# Altium PCB KORICHE_N2.PCBDOC
Units mm, origin at the board's own origin, x right, y up, seen from the top; angles counter-clockwise.
Board outline 62.36 x 50.17 mm, 2 copper layers (TopLayer, BottomLayer); 26 components, 22 nets, 109 pads, 13 vias.
Unrouted connection lines stored in the file: 2.
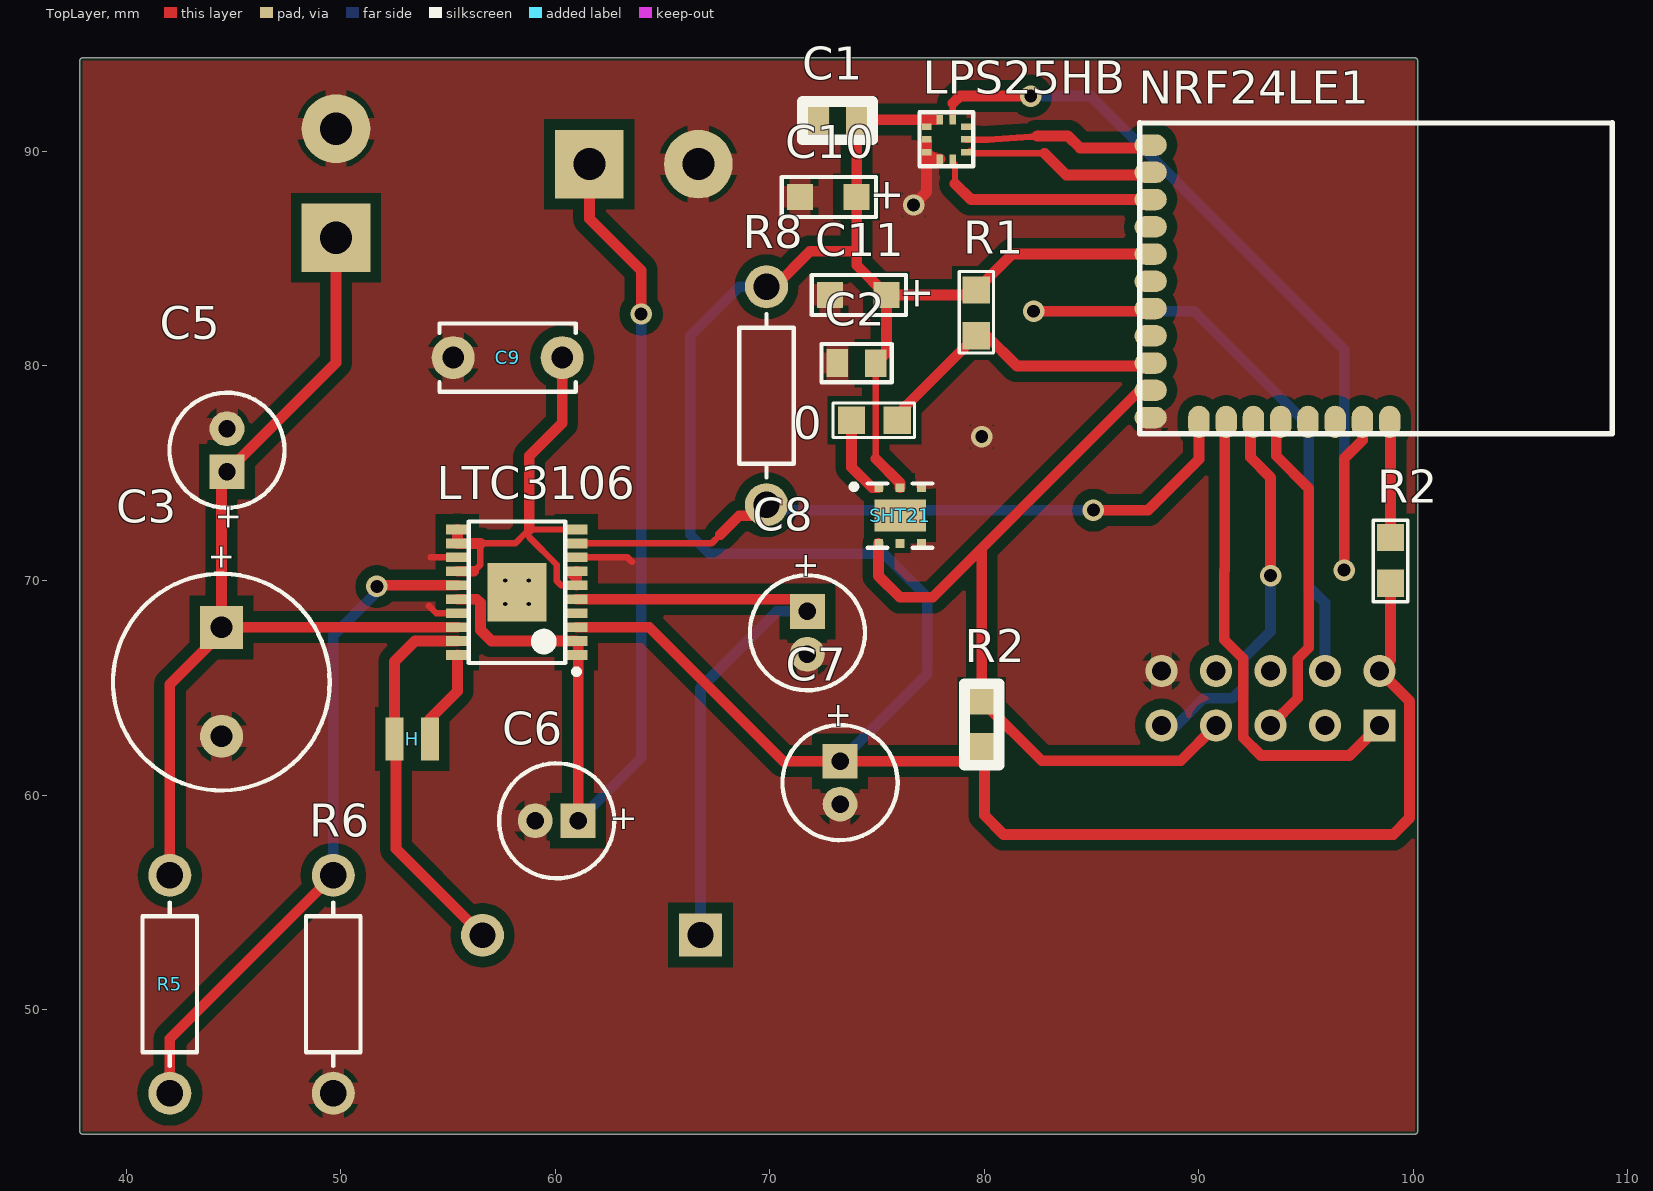
[diagram p0: TopLayer view]
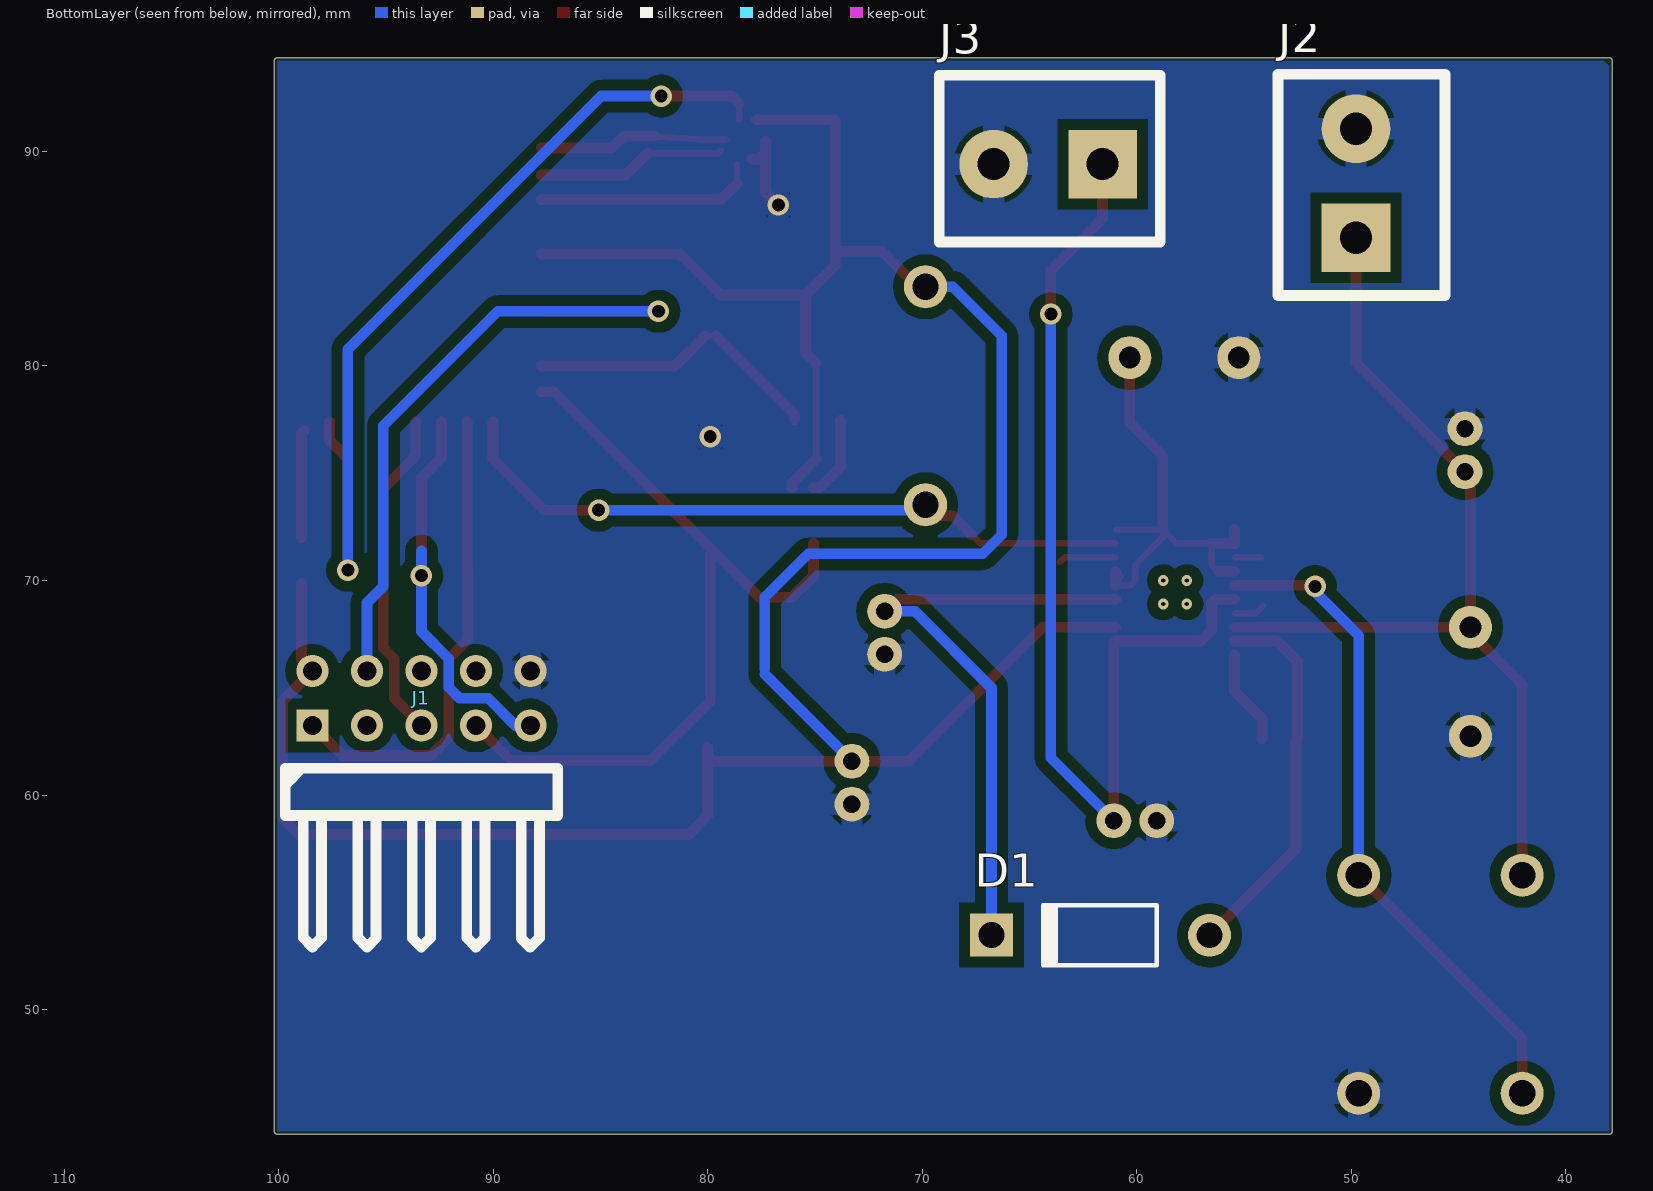
[diagram p1: BottomLayer view, seen from below]
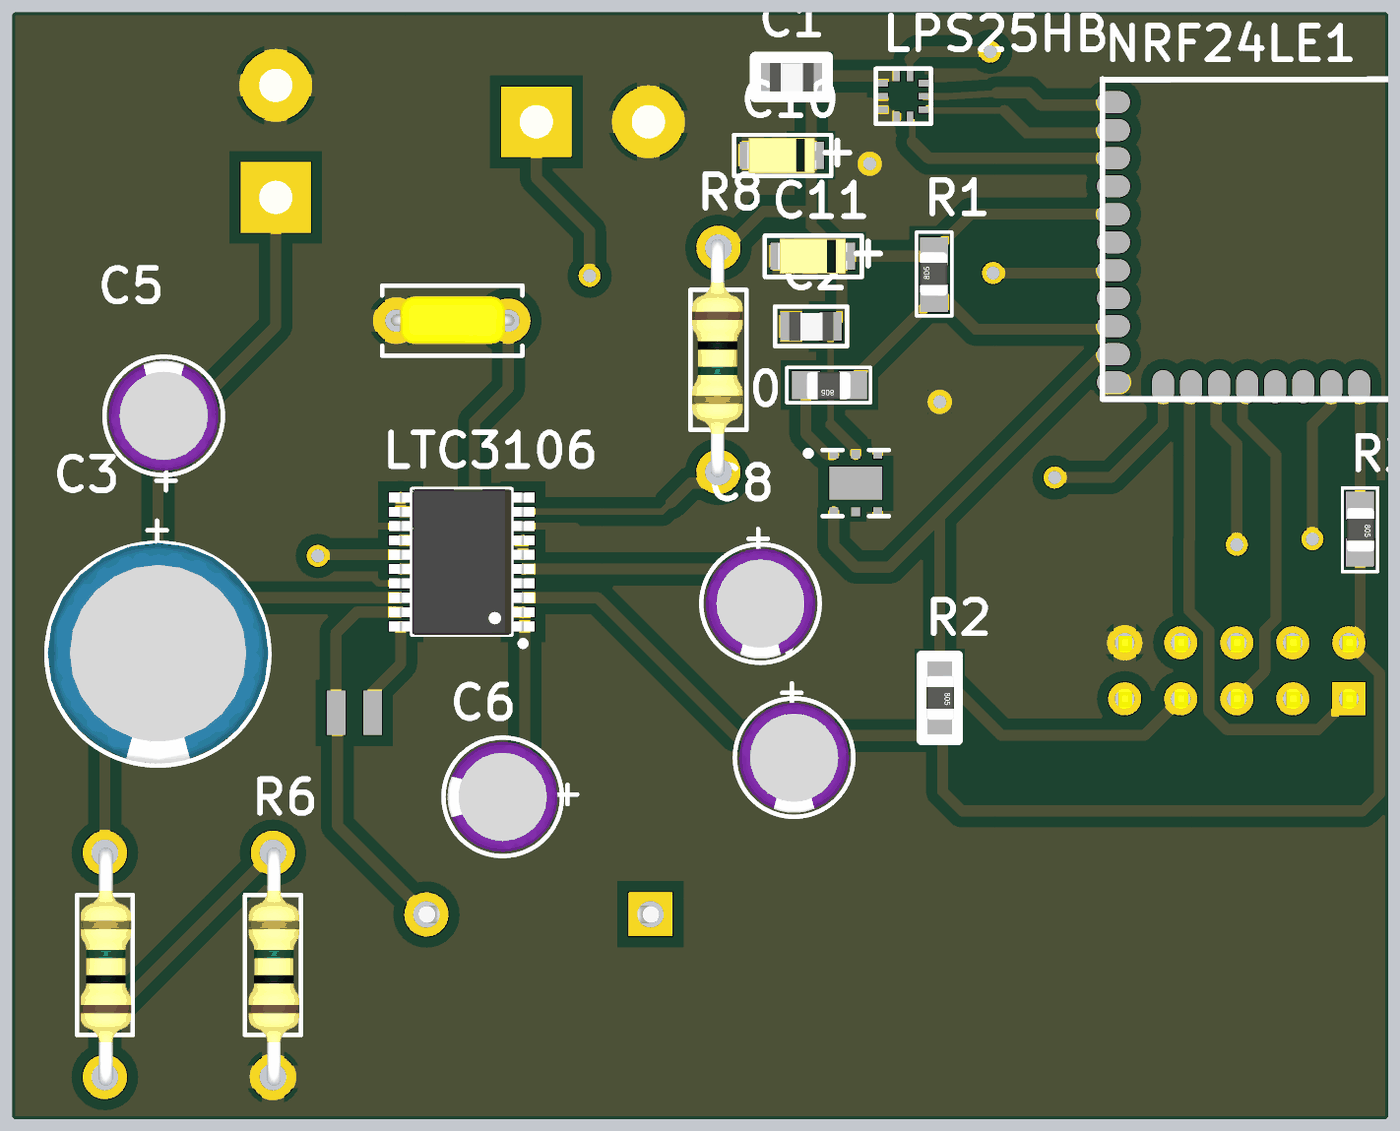
[diagram p2: 3D render of the assembled board from above, using the file's embedded part models]
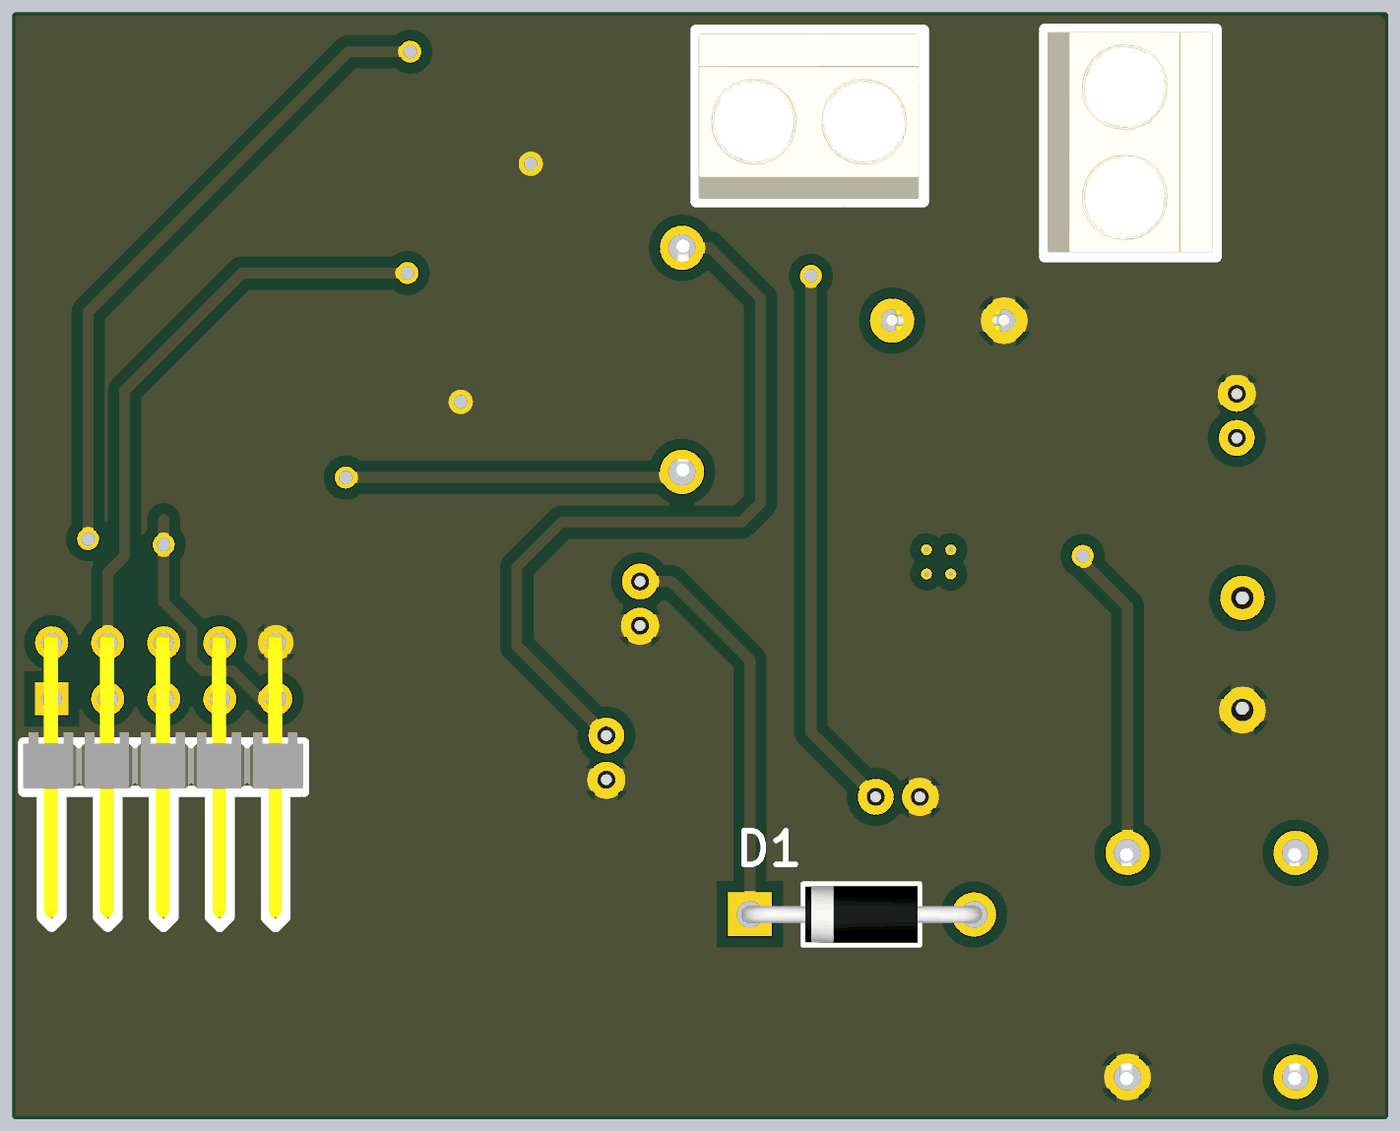
[diagram p3: 3D render of the assembled board from below, using the file's embedded part models]

## Layer stack, top to bottom
TopSolder: solder mask 0.0102, Solder Resist, Dk 3.5
TopLayer: signal copper 0.0356
Dielectric1: core 0.32, FR-4, Dk 4.8
BottomLayer: signal copper 0.0356
BottomSolder: solder mask 0.0102, Solder Resist, Dk 3.5

## Board outline
37.973,44.196 cw(c37.973,44.323) 37.846,44.323 37.846,94.234 cw(c37.973,94.234) 37.973,94.361 100.076,94.361 cw(c100.076,94.234) 100.203,94.234 100.203,44.323 cw(c100.076,44.323) 100.076,44.196

## Design rules (kind name [scope] priority, off if disabled: settings)
Clearance Clearance_15 [InNamedPolygon('GND_L02_P022')] p1: gap=0.5 ignorepadtopadclearanceinfootprint=FALSE
Clearance Clearance_14 [InNamedPolygon('GND_L01_P020')] p2: gap=0.5 ignorepadtopadclearanceinfootprint=FALSE
Clearance Clearance_13 [InNamedPolygon('GND_L01_P018')] p3: gap=0.5 ignorepadtopadclearanceinfootprint=FALSE except(0: Arc-Hole Track-Hole SMDPad-Hole THPad-Hole Via-Hole Fill-Hole Poly-Hole Region-Hole Text-Hole)
Clearance Clearance_12 [InNamedPolygon('GND_L02_P016')] p4: gap=0.5 ignorepadtopadclearanceinfootprint=FALSE except(0: Arc-Hole Track-Hole SMDPad-Hole THPad-Hole Via-Hole Fill-Hole Poly-Hole Region-Hole Text-Hole)
Clearance Clearance_11 [InNamedPolygon('BottomLayer-No Net')] p5: gap=0.5 ignorepadtopadclearanceinfootprint=FALSE except(0: Arc-Hole Track-Hole SMDPad-Hole THPad-Hole Via-Hole Fill-Hole Poly-Hole Region-Hole Text-Hole)
Clearance Clearance_10 [InNamedPolygon('BottomLayer-No Net')] p6: gap=0.5 ignorepadtopadclearanceinfootprint=FALSE except(0: Arc-Hole Track-Hole SMDPad-Hole THPad-Hole Via-Hole Fill-Hole Poly-Hole Region-Hole Text-Hole)
Clearance Clearance_9 [InNamedPolygon('NONET_L01_P004')] p7: gap=0.5 ignorepadtopadclearanceinfootprint=FALSE except(0: Arc-Hole Track-Hole SMDPad-Hole THPad-Hole Via-Hole Fill-Hole Poly-Hole Region-Hole Text-Hole)
Clearance Clearance_8 [InNamedPolygon('NONET_L01_P004')] p8: gap=0.5 ignorepadtopadclearanceinfootprint=FALSE except(0: Arc-Hole Track-Hole SMDPad-Hole THPad-Hole Via-Hole Fill-Hole Poly-Hole Region-Hole Text-Hole)
Clearance Clearance_7 [InNamedPolygon('GND_L02_P036')] p9: gap=0.254 ignorepadtopadclearanceinfootprint=FALSE except(0: Arc-Hole Track-Hole SMDPad-Hole THPad-Hole Via-Hole Fill-Hole Poly-Hole Region-Hole Text-Hole)
Clearance Clearance_6 [InNamedPolygon('NONET_L01_P004')] p10: gap=0.5 ignorepadtopadclearanceinfootprint=FALSE except(0: Arc-Hole Track-Hole SMDPad-Hole THPad-Hole Via-Hole Fill-Hole Poly-Hole Region-Hole Text-Hole)
Clearance Clearance_5 [InNamedPolygon('NONET_L01_P004')] p11: gap=0.5 ignorepadtopadclearanceinfootprint=FALSE except(0: Arc-Hole Track-Hole SMDPad-Hole THPad-Hole Via-Hole Fill-Hole Poly-Hole Region-Hole Text-Hole)
Clearance Clearance_4 [InNamedPolygon('NONET_L01_P004')] p12: gap=0.5 ignorepadtopadclearanceinfootprint=FALSE except(0: Arc-Hole Track-Hole SMDPad-Hole THPad-Hole Via-Hole Fill-Hole Poly-Hole Region-Hole Text-Hole)
Clearance Clearance_3 [InNamedPolygon('NONET_L01_P004')] p13: gap=0.5 ignorepadtopadclearanceinfootprint=FALSE except(0: Arc-Hole Track-Hole SMDPad-Hole THPad-Hole Via-Hole Fill-Hole Poly-Hole Region-Hole Text-Hole)
Clearance Clearance_2 [InNamedPolygon('NONET_L01_P004')] p14: gap=0.5 ignorepadtopadclearanceinfootprint=FALSE except(0: Arc-Hole Track-Hole SMDPad-Hole THPad-Hole Via-Hole Fill-Hole Poly-Hole Region-Hole Text-Hole)
Clearance Clearance_1 [InNamedPolygon('NONET_L02_P005') Or  InNamedPolygon('NONET_L01_P004')] p15: gap=0.5 ignorepadtopadclearanceinfootprint=FALSE except(0: Arc-Hole Track-Hole SMDPad-Hole THPad-Hole Via-Hole Fill-Hole Poly-Hole Region-Hole Text-Hole)
Clearance PowerPlaneClearance [InNamedPolygon('NONET_L02_P005') Or  InNamedPolygon('NONET_L01_P004')] p16: gap=1.016 ignorepadtopadclearanceinfootprint=FALSE except(0: Arc-Hole Track-Hole SMDPad-Hole THPad-Hole Via-Hole Fill-Hole Poly-Hole Region-Hole Text-Hole)
Clearance [All] p17: gap=0.3 ignorepadtopadclearanceinfootprint=FALSE except(0: Arc-Hole Track-Hole SMDPad-Hole THPad-Hole Via-Hole Fill-Hole Poly-Hole Region-Hole Text-Hole)
FabricationTestPointUsage TestPointUsage [All] p1: valid=0 allowmultiple=FALSE
FabricationTestpoint Testpoint [All] p1: side=3 testpointundercomponent=TRUE minsize=1.016 maxsize=2.54 preferedsize=1.524 minholesize=0.508 maxholesize=1.016 preferedholesize=0.813 testpointgrid=0.025 allowsidetop=TRUE allowsidebottom=TRUE usegrid=TRUE gridtolerance=0
Height [All] p1: minheight=0 maxheight=50.8 prefheight=12.7
HoleSize [All] p1: absolutevalues=TRUE maxlimit=7.62 minlimit=0.025 maxpercent=80.000 minpercent=20.000
PlaneClearance [All] p1: clearance=1.016
PlaneConnect [All] p1: planeconnectstyle=Relief reliefexpansion=0.5 reliefentries=4 reliefconductorwidth=1.016 reliefairgap=0.5
PolygonConnect [All] p1: connectstyle=Relief reliefconductorwidth=1.016 reliefentries=4 polygonreliefangle="90 Angle" airgapwidth=0.254
RoutingVias [All] p1: holewidth=0.6 width=1.524 viastyle="Through Hole" minholewidth=0.6 minwidth=1.524 maxholewidth=0.6 maxwidth=1.524
SilkToSolderMaskClearance SilkscreenOverComponentPads [IsPad] p1: minsilkscreentomaskgap=0.254 clearancetoexposedcopper=TRUE
SolderMaskExpansion [All] p1: expansion=0.05
Width [All] p1: maxlimit=3 minlimit=0.3 preferedwidth=0.5 minimp=50.000000 maximp=50.000000 favimp=50.000000
23 further rules are at their usual default settings.

## Components (designator, comment, footprint, x,y, rotation, side; value= is the part's Value field where it differs from the comment)
0 "RESISTANCE_CMS_0805" RESISTANCE_CMS_0805 75.946,77.47 r180 top value=1K
C1 "CMS_0805" CONDENSATEUR_CMS_0805 72.263,91.44 r0 top value=100nF
C2 "CMS_0805" CONDENSATEUR_CMS_0805 73.152,80.137 r0 top value=100nF
C3 "CONDENSATEUR_POL_ELECTROLY_RAD_5.08/10.16" CONDENSATEUR_POLARISE_ELECTROLYTIQUE_RADIAL_5.08/10.16 44.45,67.818 r270 top value=470µF/63V
C5 "CONDENSATEUR_POL_ELECTROLY_RAD_2.0/5.08" CONDENSATEUR_POLARISE_ELECTROLYTIQUE_RADIAL_2.0/5.08 44.704,76.073 r90 top value=10µF/63V
C6 "CONDENSATEUR_POL_ELECTROLY_RAD_2.0/5.08" CONDENSATEUR_POLARISE_ELECTROLYTIQUE_RADIAL_2.0/5.08 60.071,58.801 r180 top value=47µF/63V
C7 "CONDENSATEUR_POL_ELECTROLY_RAD_2.0/5.08" CONDENSATEUR_POLARISE_ELECTROLYTIQUE_RADIAL_2.0/5.08 73.279,60.579 r270 top value=47µF/63V
C8 "CONDENSATEUR_POL_ELECTROLY_RAD_2.0/5.08" CONDENSATEUR_POLARISE_ELECTROLYTIQUE_RADIAL_2.0/5.08 71.755,67.564 r270 top value=2.2µF/63V
C9 "CONDENSATEUR_CER_RAD_5.08" CONDENSATEUR_CERAMIQUE_RADIAL_5.08 60.325,80.391 r180 top value=100nF
C10 "CMS_POLARISE_TANTALE_3216-18" CONDENSATEUR_CMS_POLARISE_TANTALE_A/3216-18 74.041,87.884 r180 top value=1µF/16V
C11 "CMS_POLARISE_TANTALE_3216-18" CONDENSATEUR_CMS_POLARISE_TANTALE_A/3216-18 75.438,83.312 r180 top value=1µF/16V
D1 "DIODE_SCHOTTKY_DO41 : 1N5817" DIODE_DO41 61.722,53.467 r0 bottom
H "Bobine_22nH" SELF 53.34,62.611 r180 top
J1 "BARRETTE_5 CONTACTS_2 RANGEES_MALE_COUDEE" BARRETTE_5X2_M_C 98.425,63.246 r180 bottom
J2 "BORNIER2 DROIT A VIS" BORNIER2_A_VIS 49.784,85.979 r90 bottom
J3 "BORNIER2 DROIT A VIS" BORNIER2_A_VIS 61.595,89.408 r0 bottom
LPS25HB "LPS25HB Pressure sensor" LPS25HB_HLGA_10 78.232,90.551 r0 top
LTC3106 "LTC3106_Regulateur" ltc3106 47.117,81.153 r180 top
NRF24LE1 "NRF24LE1_32Pin" "NRF24LE1 SMD" 87.757,77.597 r90 top
R1 "RESISTANCE_CMS_0805" RESISTANCE_CMS_0805 79.629,81.407 r90 top value=1K
R2 "RESISTANCE_CMS_0805" RESISTANCE_CMS_0805 79.883,64.389 r270 top value=1K
R2 "RESISTANCE_CMS_0805" RESISTANCE_CMS_0805 98.933,72.009 r270 top value=1K
R5 "RESISTANCE_AXIALE_1/4W" RESISTANCE_1/4W 42.037,46.101 r90 top value=1K
R6 "RESISTANCE_AXIALE_1/4W" RESISTANCE_1/4W 49.657,46.101 r90 top value=1K
R8 "RESISTANCE_AXIALE_1/4W" RESISTANCE_1/4W 69.85,83.693 r270 top value=1K
SHT21 "SHT21 HUM & TEMP" "SHT21 HUMIDITY SENSOR" 76.073,73.025 r0 top

## Footprints (in the part's own frame and the unit in brackets; to place one, negate y for a bottom-side part, rotate by r counter-clockwise, add the part's x,y. Pads: shape width x height; smd on the part's side, far side on the other; paste and mask are expansions set on the pad)
BARRETTE_5X2_M_C [mm] "BARRETTE 5 CONTACTS ; 2 RANGEES ; COUDEE ; MALE ; ESPACEMENT BROCHES = 2.54 mm"
  rect 1.5x1.5 hole 0.9: 1(0,0)
  round 1.5 hole 0.9: 2(0,2.54) 3(2.54,0) 4(2.54,2.54) 5(5.08,0) 6(5.08,2.54) 7(7.62,0) 8(7.62,2.54) 9(10.16,0) 10(10.16,2.54)
  silkscreen extent -1.27,-10.34 11.43,-2, body extent -1.3,-9.9 11.4,2.86, height 5.64
BORNIER2_A_VIS [mm] "BORNIER 2 PLOTS A VIS ; VERTICAL ; ESPACEMENT BROCHES = 5.08mm"
  rect 3.2x3.2 hole 1.5: 1(0,0)
  round 3.2 hole 1.5: 2(5.08,0)
  silkscreen extent -2.69,-4.15 7.62,3.63, body extent -2.5,-4 7.5,3.5, height 10
CONDENSATEUR_CERAMIQUE_RADIAL_5.08 [mil] "CONDENSATEUR TRAVERSANT CERAMIQUE RADIAL ; DIMENSIONS : 3.17mm x 5.08mm"
  round 79 hole 40: 1(0,0) 2(200,0)
  silkscreen extent -25,-62 225,63, body extent -11,-43 209,42, height 148
CONDENSATEUR_CMS_0805 [mm] "CONDENSATEUR CMS 0805 ; DIMENSIONS : 2mm x 1.25mm"
  rect 1x1.3 smd: 1(0,0) 2(1.79,-0.01)
  silkscreen extent -0.74,-0.9 2.53,0.89, body extent -0.09,-0.67 1.91,0.64, height 0.73
CONDENSATEUR_CMS_POLARISE_TANTALE_A/3216-18 [mm] "CONDENSATEUR CMS POLARISE TANTALE BOITIER A ; DIMENSIONS : 3.2mm x 1.6mm"
  rect 1.2x1.22 smd: 1(0,0) 2(2.63,0)
  silkscreen extent -0.91,-0.93 3.48,0.94, body extent -0.28,-0.8 2.92,0.8, height 1.61
CONDENSATEUR_POLARISE_ELECTROLYTIQUE_RADIAL_2.0/5.08 [mil] "CONDENSATEUR POLARISE ELECTROLYTIQUE RADIAL ; DIAMETRE : 5.08mm ; ESPACEMENT BROCHES : 2mm"
  rect 64x64 / inner round 64 / far side round 64 hole 32: 1(-39.37,0)
  round 64 hole 32: 2(39.37,0)
  silkscreen extent -106,-106 106,105, body extent -98,-98 98,98, height 433
CONDENSATEUR_POLARISE_ELECTROLYTIQUE_RADIAL_5.08/10.16 [mil] "CONDENSATEUR POLARISE ELECTROLYTIQUE RADIAL ; DIAMETRE : 10.16mm ; ESPACEMENT BROCHES : 5.08mm"
  rect 79x79 / inner round 79 / far side round 79 hole 40: 1(0,0)
  round 79 hole 40: 2(200,0)
  silkscreen extent -98,-199 299,198, body extent -98,-197 295,197, height 630
DIODE_DO41 [mm] "DIODE DO41 ; DIMENSIONS : 5.2mm x 2.7mm ; PERCAGE : 0.8mm"
  round 2 hole 1.2: 1(-5.11,0)
  rect 2x2 hole 1.2: 2(5.05,-0.01)
  silkscreen extent -2.65,-1.4 2.75,1.4, body extent -5.47,-1.29 5.45,1.28, height 2.55
LPS25HB_HLGA_10 [mm]
  rect 0.3x0.45 smd: 1(-0.3,0.93) 2(0.3,0.93) 6(0.3,-0.91) 7(-0.3,-0.91)
  rect 0.45x0.3 smd: 3(0.92,0.61) 4(0.92,0.01) 5(0.92,-0.59) 8(-0.92,-0.59) 9(-0.92,0.01) 10(-0.92,0.61)
  silkscreen extent -1.25,-1.24 1.25,1.27
ltc3106 [mm] "TSOP, 20-Leads, Body 6,60x4,50mm, Pitch 0,65mm, Thermal Pad 2,74x2,74mm, IPC Medium Density"
  rect 1.05x0.45 smd: 1(-13.875,14.625) 2(-13.875,13.975) 3(-13.875,13.325) 4(-13.875,12.675) 5(-13.875,12.025) 6(-13.875,11.375) 7(-13.875,10.725) 8(-13.875,10.075) 9(-13.875,9.425) 10(-13.875,8.775) 11(-8.325,8.775) 12(-8.325,9.425) 13(-8.325,10.075) 14(-8.325,10.725) 15(-8.325,11.375) 16(-8.325,12.025) 17(-8.325,12.675) 18(-8.325,13.325) 19(-8.325,13.975) 20(-8.325,14.625)
  rect 2.74x2.74 smd: 21(-11.1,11.7)
  silkscreen extent -14,8.4 -8.85,15.52, body extent -14.4,8.4 -7.8,15, height 1.2
"NRF24LE1 SMD" [mm]
  oval 1.5x1 smd: 1(-0.2,-11.14) 2(-0.2,-9.87) 3(-0.2,-8.6) 4(-0.2,-7.33) 5(-0.2,-6.06) 6(-0.2,-4.79) 7(-0.2,-3.52) 8(-0.2,-2.25)
  oval 1x1.5 smd: 9(0,0) 10(1.27,0) 11(2.54,0) 12(3.81,0) 13(5.08,0) 14(6.35,0) 15(7.62,0) 16(8.89,0) 17(10.16,0) 18(11.43,0) 19(12.7,0)
  silkscreen extent -0.76,-21.51 13.75,0.51
RESISTANCE_1/4W [mil] "RESISTANCE 0.25W; DIAMETRE : 2.54mm ; LONGUEUR : 6.35mm ; PAS : 10.16mm"
  round 79 hole 48: 1(0,0) 2(400,0)
  silkscreen extent 50,-50 350,50, body extent -15,-47 409,44, height 116
RESISTANCE_CMS_0805 [mil] "RESISTANCE CMS 0805 ; DIMENSIONS : 2mm x 1.25mm"
  rect 50x50 smd: 1(0,0) 2(84,0)
  silkscreen extent -31,-31 118,31, body extent 4,-24 83,26, height 31
SELF [mm] "Precision Wire Wound Inductor, 2-Leads, Body 2,50x2,00mm, IPC Medium Density"
  rect 0.85x2 smd: 1(-0.825,0) 2(0.825,0)
  body extent -1.25,-1 1.25,1, height 1.2
"SHT21 HUMIDITY SENSOR" [mm] "DFN 6"
  rect 0.4x0.4 smd: 1(-1,-1.3) 2(0,-1.3) 3(1,-1.3) 4(1,1.3) 5(0,1.3) 6(-1,1.3)
  rect 2.4x1.5 smd: 7(0,0)
  silkscreen extent -2.27,-1.5 1.5,1.5, body extent -1.5,-1.5 1.5,1.5, height 1.1

## Part data
0 R1 R2 R2: "RESISTANCE CMS 0805", Type=CMS_0805
C1 C2: library part CONDENSATEUR_CMS_CER_0805, "CONDENSATEUR CMS CERAMIQUE 0805", Type=CMS_0805
C3: "CONDENSATEUR POLARISE ELECTROLYTIQUE RADIAL 5.08/10.16", Type=POL_RAD_5.08/10.16
C5 C6 C7 C8: "CONDENSATEUR POLARISE ELECTROLYTIQUE RADIAL 2.0/5.08", Type=POL_RAD_2.0/5.08
C9: "CONDENSATEUR TRAVERSANT CERAMIQUE RADIAL 5.08mm", Type=RADIAL_5.08
C10 C11: library part CONDENSATEUR_CMS_POL_TANT_A_3216-18, "CONDENSATEUR CMS POLARISE TANTALE BOITIER A/3216-18", Type=CMS_TANTALE_3216-18
D1: "DIODE SCHOTTKY DO41 : 1N5817", Package=DO41, Type=1N5817
J1: "BARRETTE 5 CONTACTS 2 RANGEES MALE COUDEE", Type=M_C_5X2
J2 J3: library part "BORNIER2_DROIT_A VIS", "BORNIER 2 PLOTS DROIT A VIS 5.08mm", Type=BORNIER2_D
LPS25HB: library part "LPS25HB_Pression Sensor", "LPS25HB_Pressure_Sensor", Type=LPS25HB
LTC3106: library part "LTC31068FE PACKAGE", "LTC3106_Regulateur_MPC", Type=LTC3106
R5 R6 R8: "RESISTANCE TRAVERSANTE AXIALE 1/4W", Type=1/4W
SHT21: library part SHT21_HUM_&_TEMP_Sensors_DFN, "SHT21 HUM & TEMP Sensors DFN", Type=SHT21_HUM_&_TEMP
H: Type=Bobine_10uH
NRF24LE1: =NRF24LE1_32Pin

## Via types
v1: diameter 1, hole 0.6, TopLayer to BottomLayer, 9 vias
v2: diameter 0.5, hole 0.2, TopLayer to BottomLayer, 4 vias

## Nets (pads, with @x,y where several pads share a name; then routed paths per layer and width w, separated by ;. In a path a pad name is that pad's centre, name@x,y a point inside that pad or via, vN(x,y) a via of type N, cw(c..) or ccw(c..) an arc to the next point about the centre after c; other vN are vias at no path point)
1: C6.1 J3.1 LTC3106.1 LTC3106.2 LTC3106.16 | length 48.3
  TopLayer w0.5: LTC3106.16 56.348,69.128 56.515,68.961 56.515,67.691 57.028,67.178 LTC3106.2 LTC3106.2@60.992,67.099 ; C6.1 LTC3106.2@61.071,67.099 ; J3.1 61.595,86.868 64.008,84.455 v1(64.008,82.423)
  BottomLayer w0.5: C6.1 64.008,61.738 v1(64.008,82.423)
CS: LPS25HB.6 NRF24LE1.17 | length 10.3
  TopLayer w0.3: 78.636,88.496 78.636,89.408
  TopLayer w0.508: 78.636,88.496 79.375,87.757 NRF24LE1.17
FCSN: J1.5 NRF24LE1.5 | length 15.5
  TopLayer w0.5: J1.5 94.615,64.516 94.615,66.354 95.123,66.862 95.123,74.295 93.607,75.811 NRF24LE1.5@93.607,77.397
FMISO: J1.9 NRF24LE1.6 | length 19
  TopLayer w0.5: NRF24LE1.6@92.407,77.397 92.407,75.741 93.345,74.803 v1(93.345,70.231)
  BottomLayer w0.5: J1.9 88.967,63.246 90.237,64.516 91.567,64.516 92.075,65.024 92.075,66.354 93.345,67.624 93.345,71.374
FMOSI: J1.1 NRF24LE1.7 | length 22.4
  TopLayer w0.5: 91.186,70.485 91.186,67.243 92.075,66.354 92.075,62.678 92.904,61.849 97.028,61.849 J1.1 ; 91.207,70.485 NRF24LE1.7@91.207,77.397
GND: C1.1 C2.1 C3.2 C5.2 C6.2 C7.2 C8.2 C9.2 C10.2 C11.2 J1.10 J2.2 J3.2 LPS25HB.3 LPS25HB.7 LPS25HB.8 LPS25HB.9 LTC3106.8 LTC3106.13 LTC3106.17 NRF24LE1.9 R6.1 SHT21.2 SHT21.3 SHT21.4 | length 9.5
  TopLayer w0.3: 54.102,68.834 54.458,68.478 LTC3106.17 ; 54.187,71.078 LTC3106.13 ; LTC3106.8 63.371,71.078 63.583,70.866 ; v1@79.883,76.581 v1(79.883,76.708)
  TopLayer w0.508: v1(76.708,87.503) 77.312,88.107 LPS25HB.8 ; LPS25HB.9@77.312,90.457 LPS25HB.8 ; LPS25HB.7 77.632,89.641 LPS25HB.8
HT_SCL: 0.1 NRF24LE1.11 R1.1 | length 13.7
  TopLayer w0.5: 0.1 75.946,77.724 R1.1 ; R1.1@80.111,81.407 81.521,79.997 NRF24LE1.11@87.757,79.997
HT_SDA: J1.7 NRF24LE1.10 R2.1@79.883,64.389 SHT21.1 | length 38.5
  TopLayer w0.5: SHT21.1 75.073,70.215 76.073,69.215 77.597,69.215 79.883,71.501 ; NRF24LE1.10@87.757,78.797 87.179,78.797 79.883,71.501 ; J1.7 89.154,61.595 82.677,61.595 79.883,64.389 79.883,71.501
Net0_2: 0.2 SHT21.6 | length 3.8
  TopLayer w0.5: 0.2 73.812,75.286 74.773,74.325 SHT21.6
NetC8_1: C8.1 D1.2 LTC3106.5 | length 29
  TopLayer w0.5: LTC3106.5 71.191,69.128 C8.1
  BottomLayer w0.5: D1.2 66.772,64.994 70.342,68.564 C8.1
NetH_1: H.1 LTC3106.20 | length 4.4
  TopLayer w0.5: H.1 54.165,63.563 55.442,64.84 LTC3106.20
NetNRF24LE1_1: NRF24LE1.1 R2.1@98.933,72.009 | length 5
  TopLayer w0.5: NRF24LE1.1@98.806,76.998 98.933,76.871 R2.1@98.933,72.009
PGOOD: LTC3106.9 NRF24LE1.8 R8.2 | length 31.9
  TopLayer w0.3: LTC3106.9 67.283,71.728 67.691,72.136
  TopLayer w0.5: 67.691,72.136 68.58,73.025 R8.2@69.342,73.025 ; v1(85.09,73.279) 87.63,73.279 90.007,75.656 NRF24LE1.8
  BottomLayer w0.5: R8.2 70.104,73.279 v1(85.09,73.279)
PROG: J1.4 NRF24LE1.13 | length 32.1
  TopLayer w0.5: v1(82.296,82.55) 82.299,82.547 NRF24LE1.13@87.607,82.547
  BottomLayer w0.5: v1(82.296,82.55) 89.789,82.55 95.123,77.216 95.123,69.723 95.885,68.961 J1.4
RUN: LTC3106.15 R5.1 R6.2 | length 31.4
  TopLayer w0.5: R5.1 42.037,48.641 R6.2 ; v1(51.689,69.723) 51.744,69.778 LTC3106.15
  BottomLayer w0.5: R6.2 49.657,67.437 51.689,69.469 v1(51.689,69.723)
SCLK: LPS25HB.2 NRF24LE1.2 | length 41.6
  TopLayer w0.3: LPS25HB.2 78.532,92.248
  TopLayer w0.5: 78.532,92.248 78.867,92.583 v1(82.169,92.583) ; v1(96.774,70.485) 96.774,75.692 97.627,76.545 NRF24LE1.2
  BottomLayer w0.5: v1(82.169,92.583) 84.963,92.583 96.774,80.772 v1(96.774,70.485)
SDI: LPS25HB.4 NRF24LE1.19 | length 9.6
  TopLayer w0.3: LPS25HB.4@79.152,90.551 80.16,90.551 82.177,90.678 83.185,90.678
  TopLayer w0.508: 82.465,90.72 83.905,90.72 84.455,90.17 NRF24LE1.19@87.757,90.17
SDO: LPS25HB.5 NRF24LE1.18 | length 8.9
  TopLayer w0.3: LPS25HB.5@79.375,90.043 79.502,89.916 82.804,89.916
  TopLayer w0.5: 82.804,89.916 83.82,88.9 NRF24LE1.18@87.757,88.9
SHT: D1.1 H.2 LTC3106.19 | length 17.8
  TopLayer w0.5: LTC3106.19 53.462,67.178 52.515,66.231 H.2 52.578,62.548 52.578,57.501 D1.1
Solar_Cell: C3.1 C5.1 J2.1 LTC3106.18 R5.2 | length 43.7
  TopLayer w0.5: R5.2 42.037,65.151 C3.1@44.45,67.564 ; C3.1 44.45,74.819 C5.1 49.784,80.153 J2.1 ; C3.1@44.46,67.828 LTC3106.18
V: C1.2 C2.2 C7.1 C10.1 C11.1 J1.2 LPS25HB.1 LPS25HB.10 LTC3106.3 NRF24LE1.15 R1.2 R2.2 R8.1 SHT21.5 | length 132
  TopLayer w0.3: 74.942,75.68 C2.2
  TopLayer w0.5: LTC3106.3 64.379,67.828 70.628,61.579 C7.1 79.74,61.579 R2.2@79.883,61.722 ; R8.1 70.231,83.693 71.882,85.344 74.053,85.344 ; C1.2 74.053,85.344 ; C1.2@74.104,91.481 77.724,91.481 ; 74.942,75.68 76.073,74.549 SHT21.5 ; C2.2 75.438,80.623 C11.1 ; R2.2@80.01,62.23 80.01,59.055 80.899,58.166 99.06,58.166 99.822,58.928 99.822,64.389 J1.2 98.933,66.294 R2.2@98.933,69.875 ; NRF24LE1.15 81.305,85.217 R1.2 79.4,83.312 C11.1 ; 74.053,85.344 74.053,84.697 C11.1
  BottomLayer w0.5: R8.1 68.58,83.693 66.294,81.407 66.294,72.136 67.183,71.247 75.311,71.247 77.343,69.215 77.343,65.913 ; C7.1 77.343,65.643
VCCR: C9.1 LTC3106.6 LTC3106.7 LTC3106.10 LTC3106.11 LTC3106.12 LTC3106.14 | length 21.6
  TopLayer w0.3: 56.204,70.428 56.515,70.739 56.515,71.728 58.139,71.728 58.61,72.2 ; 58.801,72.009 60.071,70.739 60.071,69.977 60.27,69.778 LTC3106.6 ; 58.801,72.378 LTC3106.10 ; 60.751,70.186 LTC3106.7
  TopLayer w0.5: LTC3106.14 56.204,70.428 ; LTC3106.11 LTC3106.12 56.515,71.728 ; 58.789,72.378 58.789,75.807 60.325,77.343 C9.1 ; LTC3106.6 LTC3106.7
pads on no net: J1.3 J1.6 J1.8 LTC3106.4 LTC3106.21 NRF24LE1.3 NRF24LE1.4 NRF24LE1.12 NRF24LE1.14 NRF24LE1.16 SHT21.7
copper on no net:
  other v2: 57.667,68.903 58.767,68.903 57.667,70.003 58.767,70.003

## Polygon pours and split planes (outlines as drawn)
GND on TopLayer "GND_L01_P020" (solid, remove dead copper, pour order 20): 37.973,94.234 100.076,94.234 100.076,44.323 37.973,44.323
GND on BottomLayer "GND_L02_P022" (solid, remove dead copper, pour order 22): 37.973,93.98 38.227,94.234 100.076,94.234 100.076,44.323 37.973,44.323

## Other copper
TopLayer:

## Silkscreen, mask and mechanical layers (free items; w line width, h text height)
Mechanical15:
  lines w0.254: 37.973,44.323 37.973,94.234 100.076,94.234 100.076,44.323 37.973,44.323

## Text inside footprints (layer, text, board x,y; h text height)
C3: TopOverlay "+" at 43.96,71.728 h1.14 r270
C5: TopOverlay "+" at 45.254,72.293 h1.14 r90
C6: TopOverlay "+" at 63.851,59.351 h1.14 r180
C7: TopOverlay "+" at 72.729,64.359 h1.14 r270
C8: TopOverlay "+" at 71.205,71.344 h1.14 r270
C10: TopOverlay "+" at 76.291,88.564 h1.43 r180
C11: TopOverlay "+" at 77.688,83.992 h1.43 r180